# Altium PCB PCB1.PcbDoc
Units mm, origin at the board's own origin, x right, y up, seen from the top; angles counter-clockwise.
Board outline 80 x 45 mm, 2 copper layers (Top Layer, Bottom Layer); 11 components, 19 nets, 75 pads, 0 vias.
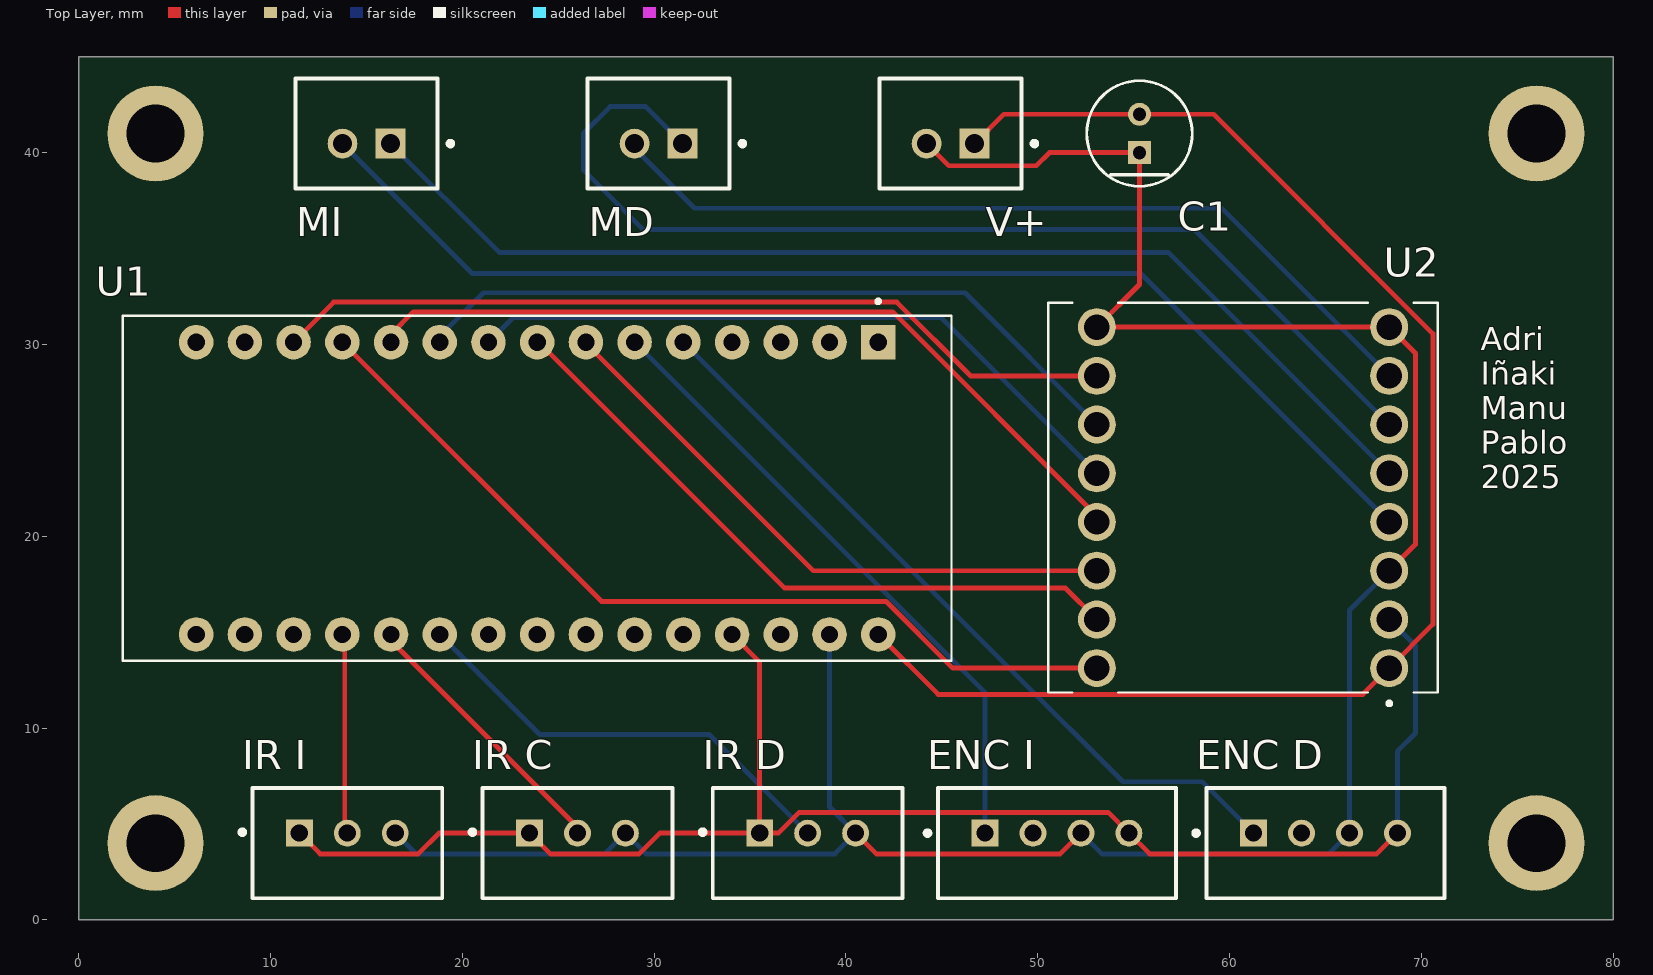
[diagram p0: Top Layer view]
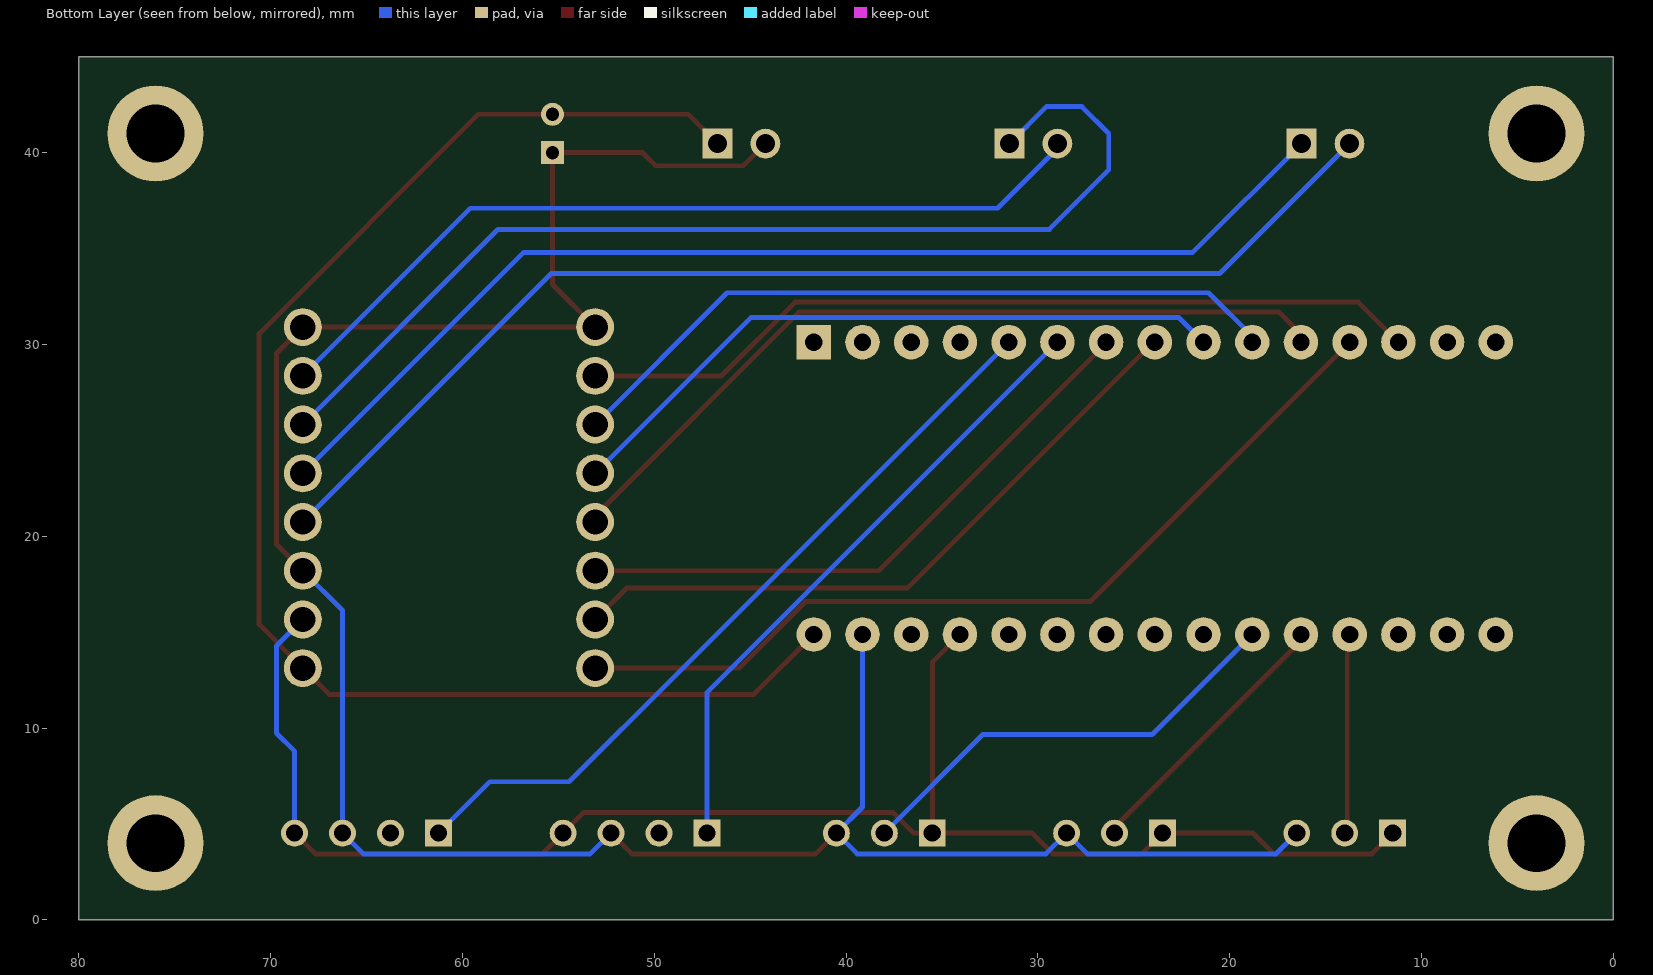
[diagram p1: Bottom Layer view, seen from below]
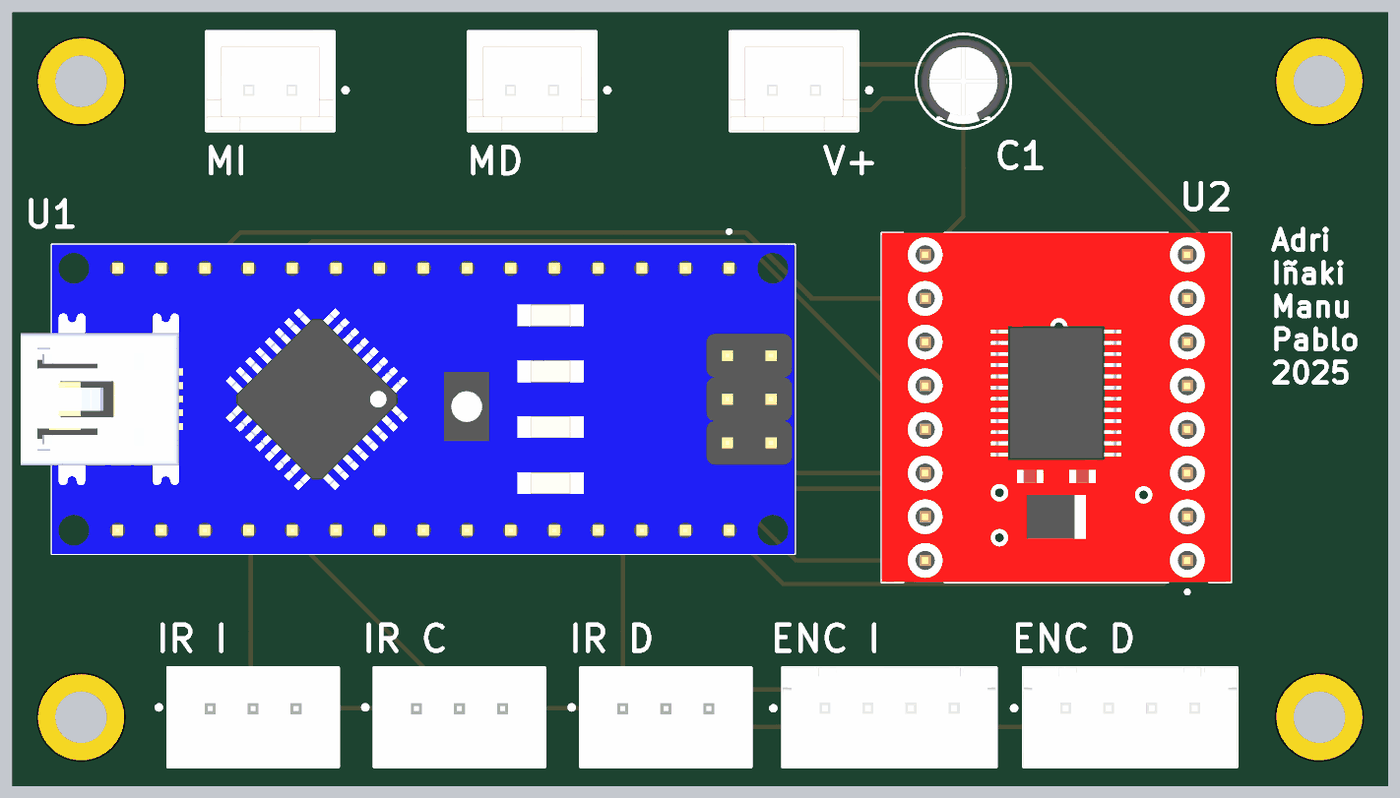
[diagram p2: 3D render of the assembled board from above, using the file's embedded part models]

## Layer stack, top to bottom
Top Solder: solder mask 0.0102, Solder Resist, Dk 3.5
Top Layer: signal copper 0.0356
Dielectric 1: dielectric 0.32, FR-4, Dk 4.8
Bottom Layer: signal copper 0.0356
Bottom Solder: solder mask 0.0102, Solder Resist, Dk 3.5

## Board outline
0,0 0,45 80,45 80,0

## Design rules (kind name [scope] priority, off if disabled: settings)
Clearance [All] p1: gap=0.254 ignorepadtopadclearanceinfootprint=FALSE
PolygonConnect [All] p1: connectstyle=Relief reliefconductorwidth=0.254 reliefentries=4 polygonreliefangle="90 Angle" airgapwidth=0.254
RoutingVias [All] p1: holewidth=0.711 width=1.27 viastyle="Through Hole" minholewidth=0.711 minwidth=1.27 maxholewidth=0.711 maxwidth=1.27
SolderMaskExpansion [All] p1: expansion=0.102 istentingtop=FALSE
SupplyNets "Schematic Supply Nets_2" [InNet('GND')] p1: voltage=0.000
SupplyNets "Schematic Supply Nets_1" [InNet('VCC')] p2: voltage=0.000
SupplyNets "Schematic Supply Nets" [InNet('+5')] p3: voltage=0.000
Width [All] p1: maxlimit=0.254 minlimit=0.254 preferedwidth=0.254
30 further rules are at their usual default settings.

## Components (designator, comment, footprint, x,y, rotation, side; value= is the part's Value field where it differs from the comment)
C1 "100 uF" FP-RAD-TH-D_5_0_5-L_11_1-MFG 55.3,41 r90 top
"ENC D" "Encoder D" FP-B4B-XH-A_LF_SN-MFG 65,4 r180 top (schematic designator J8)
"ENC I" "Encoder I" FP-B4B-XH-A_LF_SN-MFG 51,4 r180 top (schematic designator J7)
"IR C" "IR Centro" FP-B3B-XH-A_LF_SN-MFG 26,4 r0 top (schematic designator J5)
"IR D" "IR Derecha" FP-B3B-XH-A_LF_SN-MFG 38,4 r0 top (schematic designator J6)
"IR I" "IR Izquierda" FP-B3B-XH-A_LF_SN-MFG 14,4 r0 top (schematic designator J4)
MD "Motor D" FP-B2B-XH-A_LF_SN-MFG 30.225,41 r180 top (schematic designator J2)
MI "Motor I" FP-B2B-XH-A_LF_SN-MFG 15,41 r180 top (schematic designator J3)
U1 "ARDUINO_NANO" MODULE_ARDUINO_NANO 23.9,22.5 r270 top
U2 "ROB-14450" MODULE_ROB-14450 60.7,22.015 r180 top (schematic designator U?)
V+ "Supply" FP-B2B-XH-A_LF_SN-MFG 45.45,41 r180 top (schematic designator J1)

## Footprints (in the part's own frame and the unit in brackets; to place one, negate y for a bottom-side part, rotate by r counter-clockwise, add the part's x,y. Pads: shape width x height; smd on the part's side, far side on the other; paste and mask are expansions set on the pad)
FP-B2B-XH-A_LF_SN-MFG [mm]
  rect 1.55x1.55 hole 1 paste-2539.97 mask+0: 1(-1.25,0.525)
  round 1.55 hole 1 paste-2539.97 mask+0: 2(1.25,0.525)
  silkscreen extent -4.5,-2.88 3.7,2.88, body extent -3.8,-2.98 3.8,2.98, height 0.25
FP-B3B-XH-A_LF_SN-MFG [mm]
  rect 1.4x1.4 hole 0.9 paste-2539.97 mask+0: 1(-2.5,0.525)
  round 1.4 hole 0.9 paste-2539.97 mask+0: 2(0,0.525) 3(2.5,0.525)
  silkscreen extent -5.6,-2.88 4.95,2.88, body extent -5.05,-2.98 5.05,2.98, height 0.25
FP-B4B-XH-A_LF_SN-MFG [mm]
  rect 1.4x1.4 hole 0.9 paste-2539.97 mask+0: 1(3.75,-0.525)
  round 1.4 hole 0.9 paste-2539.97 mask+0: 2(1.25,-0.525) 3(-1.25,-0.525) 4(-3.75,-0.525)
  silkscreen extent -6.2,-2.88 6.87,2.88, body extent -6.3,-2.98 6.3,2.98, height 0.25
FP-RAD-TH-D_5_0_5-L_11_1-MFG [mm]
  rect 1.2x1.2 hole 0.7 paste-2539.97 mask+0: 1(-1,0)
  round 1.2 hole 0.7 paste-2539.97 mask+0: 2(1,0)
  silkscreen extent -2.75,-2.75 2.75,2.75, body extent -2.85,-2.85 2.85,2.85, height 0.25
MODULE_ARDUINO_NANO [mm]
  rect 1.8x1.8 / inner round 1.8 / far side rect 1.8x1.8 hole 0.9: 1(-7.62,17.78)
  round 1.8 hole 0.9: 2(-7.62,15.24) 3(-7.62,12.7) 4(-7.62,10.16) 5(-7.62,7.62) 6(-7.62,5.08) 7(-7.62,2.54) 8(-7.62,0) 9(-7.62,-2.54) 10(-7.62,-5.08) 11(-7.62,-7.62) 12(-7.62,-10.16) 13(-7.62,-12.7) 14(-7.62,-15.24) 15(-7.62,-17.78) 16(7.62,-17.78) 17(7.62,-15.24) 18(7.62,-12.7) 19(7.62,-10.16) 20(7.62,-7.62) 21(7.62,-5.08) 22(7.62,-2.54) 23(7.62,0) 24(7.62,2.54) 25(7.62,5.08) 26(7.62,7.62) 27(7.62,10.16) 28(7.62,12.7) 29(7.62,15.24) 30(7.62,17.78)
  silkscreen extent -9.85,-21.6 9,21.6, body extent -9,-23.4 9,21.6, height 12.6
MODULE_ROB-14450 [mm]
  round 1.98 hole 1.32: 1(-7.62,8.89) 2(-7.62,6.35) 3(-7.62,3.81) 4(-7.62,1.27) 5(-7.62,-1.27) 6(-7.62,-3.81) 7(-7.62,-6.35) 8(-7.62,-8.89) 9(7.62,-8.89) 10(7.62,-6.35) 11(7.62,-3.81) 12(7.62,-1.27) 13(7.62,1.27) 14(7.62,3.81) 15(7.62,6.35) 16(7.62,8.89)
  silkscreen extent -10.16,-10.16 10.16,10.83, body extent -10.16,-10.16 10.16,10.16, height 5.5

## Part data
C1: library part CMP-05427-001295-1, "Aluminum Electrolytic Capacitors (Radial Lead Type) 100uF ±20% 16V", Capacitance=10uF, Case/Package=Radial, Max Operating Temperature=105°C, Min Operating Temperature=-40°C, Ripple Current (AC)=250mA, Tolerance=20%, Voltage=50V, Construction=RADIAL, Diameter=5mm, Height=11mm, Impedance=340mR, Lead Diameter=0.5mm, Lead Pitch=2mm, Life (Hours)=5000Hour, REACH SVHC=Yes, RoHS Compliant=Yes, Series="FR Radial", Termination=Radial, Voltage Rating=50V
"ENC D" "ENC I": library part CMP-17439-000250-1, "CONN HEADER VERT 4POS 2.5MM", Color=Natural, Contact Resistance=20mR, Current Rating=3A, Flammability Rating="UL94 V-0", Housing Color=White, Insulation Resistance=1GR, Max Operating Temperature=85°C, Max Voltage Rating (AC)=250V, Min Operating Temperature=-25°C, Package Quantity=500, Connector Type=Header, Contact Finish - Mating=TIN, Contact Material=Brass, Contact Plating=Tin, Contact Shape=Square, Contact Type="Male Pin", Depth=5.75mm, Fastening Type=Detent, Gender=Male, Housing Material=Polyamide, Insulation Color=Natural, Insulation Material=Nylon, Lead Free="Lead Free", Lead Pitch=2.5mm, Length=12.4mm, Mated Stacking Heights=9.8mm, Material=Polyamide, Max Current Rating=3A, Max Voltage Rating (DC)=250V, Mount="Through Hole", Number of Contacts=4, Number of Positions=4, Number of Rows=1, Orientation=Straight, Packaging=Bulk, Pitch=2.5mm, REACH SVHC="No SVHC", Series=XH, Termination=Solder, Voltage Rating=250V, Voltage Rating (AC)=250V, Wire/Cable Gauge=22AWG
"IR C" "IR D" "IR I": library part CMP-17439-000014-3, "CONN HEADER VERT 3POS 2.5MM", Color=Natural, Contact Resistance=20mR, Current Rating=3A, Flammability Rating="UL94 V-0", Housing Color=White, Insulation Resistance=1GR, Max Operating Temperature=85°C, Max Voltage Rating (AC)=250V, Min Operating Temperature=-25°C, Connector Type=Header, Contact Finish - Mating=TIN, Contact Material=Brass, Contact Plating=Tin, Contact Shape=Square, Contact Type="Male Pin", Depth=5.75mm, Fastening Type=Detent, Gender=Male, Housing Material=Polyamide, Insulation Color=Natural, Insulation Material=Nylon, Lead Free="Lead Free", Lead Pitch=2.5mm, Length=9.9mm, Max Current Rating=3A, Max Voltage Rating (DC)=250V, Mount="Through Hole", Number of Contacts=3, Number of Positions=3, Number of Rows=1, Orientation=Straight, Packaging=Bulk, Pitch=2.5mm, REACH SVHC="No SVHC", Series=XH, Termination=Solder, Voltage Rating=250V, Voltage Rating (AC)=250V, Wire/Cable Gauge=22AWG
MD MI V+: library part CMP-2000-05888-3, "CONN HEADER VERT 2POS 2.5MM", Color=Natural, Contact Resistance=20mR, Current Rating=3A, Housing Color=White, Insulation Resistance=1GR, Max Operating Temperature=85°C, Max Voltage Rating (AC)=250V, Min Operating Temperature=-25°C, Connector Type="Male Pin", Contact Material=Brass, Contact Plating=Tin, Contact Type="Male Pin", Depth=5.75mm, Fastening Type=Detent, Housing Material=Polyamide, Lead Free="Lead Free", Lead Pitch=2.5mm, Length=7.4mm, Max Current Rating=3A, Max Voltage Rating (DC)=250V, Mount="Through Hole", Number of Contacts=2, Number of Positions=2, Number of Rows=1, Orientation=Straight, Packaging=Bulk, Pitch=2.5mm, REACH SVHC="No SVHC", Series=XH, Termination=Solder, Voltage Rating=250V, Voltage Rating (AC)=250V, Wire/Cable Gauge=22AWG
U1: "Small, complete, and breadboard-friendly board based on the ATmega328 (Arduino Nano 3.x)", Package="Non-Standard Arduino", Check_prices=https://www.snapeda.com/parts/Arduino%20Nano/Arduino/view-part/?ref=eda, MF=Arduino, MP="Arduino Nano", SnapEDA_Link=https://www.snapeda.com/parts/Arduino%20Nano/Arduino/view-part/?ref=snap
U2: "TB6612FNG Motor Controller/Driver Power Management Evaluation Board", Package=None, Availability="In Stock", Check_prices=https://www.snapeda.com/parts/ROB-14450/SparkFun%20Electronics/view-part/2656367/?ref=eda, MF="SparkFun Electronics", MP=ROB-14450, Price=None, SnapEDA_Link=https://www.snapeda.com/parts/ROB-14450/SparkFun%20Electronics/view-part/2656367/?ref=snap

## Free pads (board coordinates)
  round 5 hole 3: 1(4,4) 2(76,4) 3(76,41) 4(4,41)

## Nets (pads, with @x,y where several pads share a name; then routed paths per layer and width w, separated by ;. In a path a pad name is that pad's centre, name@x,y a point inside that pad or via, vN(x,y) a via of type N, cw(c..) or ccw(c..) an arc to the next point about the centre after c; other vN are vias at no path point)
+5: "ENC D.4" "ENC I.4" "IR C.1" "IR D.1" "IR I.1" U1.27 U2.2 | length 83.9
  Top Layer w0.254: 11.5,4.525 12.581,3.444 17.699,3.444 18.78,4.525 23.5,4.525 24.581,3.444 29.213,3.444 30.294,4.525 35.5,4.525 ; U1.27 35.5,13.44 35.5,4.525 ; 68.75,4.525 67.669,3.444 55.831,3.444 54.75,4.525 53.669,5.606 37.552,5.606 36.471,4.525 35.5,4.525
  Bottom Layer w0.254: U2.2 69.691,14.294 69.691,9.735 68.75,8.793 68.75,4.525
GND: "ENC D.3" "ENC I.3" "IR C.3" "IR D.3" "IR I.3" C1.1 U1.29 U2.3 U2.8 U2.9 V+.2 | length 129.7
  Top Layer w0.254: 40.5,4.525 41.581,3.444 51.169,3.444 52.25,4.525 ; V+.2 45.356,39.319 49.926,39.319 50.607,40 C1.1 55.3,33.125 U2.9 U2.8 69.691,29.534 69.691,19.576 U2.3
  Bottom Layer w0.254: 16.5,4.525 17.581,3.444 27.419,3.444 28.5,4.525 29.581,3.444 39.419,3.444 40.5,4.525 39.14,5.885 U1.29 ; 52.25,4.525 53.331,3.444 65.169,3.444 66.25,4.525 66.25,16.135 U2.3
NetJ2_1: MD.1 U2.6 | length 56
  Bottom Layer w0.254: MD.1 29.55,42.4 27.7,42.4 26.3,41 26.3,39.1 29.4,36 58.145,36 U2.6
NetJ2_2: MD.2 U2.7 | length 44.5
  Bottom Layer w0.254: MD.2 28.975,40.225 32.1,37.1 59.585,37.1 U2.7
NetJ3_1: MI.1 U2.5 | length 59.2
  Bottom Layer w0.254: MI.1 21.925,34.8 56.805,34.8 U2.5
NetJ3_2: MI.2 U2.4 | length 62.7
  Bottom Layer w0.254: MI.2 20.525,33.7 55.365,33.7 U2.4
NetJ4_2: "IR I.2" U1.19 | length 10.5
  Top Layer w0.254: U1.19 13.87,14.75 13.87,4.655 14,4.525
NetJ5_2: "IR C.2" U1.20 | length 14.4
  Top Layer w0.254: U1.20 16.28,14.555 26,4.835 26,4.525
NetJ6_2: "IR D.2" U1.21 | length 23.5
  Bottom Layer w0.254: U1.21 24.036,9.664 32.861,9.664 38,4.525
NetJ7_1: "ENC I.1" U1.6 | length 33.2
  Bottom Layer w0.254: U1.6 47.25,11.85 47.25,4.525
NetJ8_1: "ENC D.1" U1.5 | length 40.3
  Bottom Layer w0.254: U1.5 48.8,12.84 54.44,7.2 58.575,7.2 61.25,4.525
NetU1_7: U1.7 U2.14 | length 31.6
  Top Layer w0.254: U1.7 26.44,30.06 38.295,18.205 U2.14
NetU1_8: U1.8 U2.15 | length 35.2
  Top Layer w0.254: U1.8 23.98,30.12 36.8,17.3 51.445,17.3 U2.15
NetU1_9: U1.9 U2.12 | length 35.6
  Bottom Layer w0.254: U1.9 22.641,31.401 44.964,31.401 U2.12
NetU1_10: U1.10 U2.11 | length 38.4
  Bottom Layer w0.254: U1.10 18.82,30.42 21.1,32.7 46.205,32.7 U2.11
NetU1_11: U1.11 U2.13 | length 42.4
  Top Layer w0.254: U1.11 16.28,30.538 17.442,31.7 42.439,31.7 53.08,21.059 U2.13
NetU1_12: U1.12 U2.16 | length 46.4
  Top Layer w0.254: U1.12 27.26,16.6 42.1,16.6 45.575,13.125 U2.16
NetU1_13: U1.13 U2.10 | length 44.3
  Top Layer w0.254: U1.13 13.288,32.208 42.649,32.208 46.492,28.365 U2.10
VCC: C1.2 U1.30 U2.1 V+.1 | length 76.2
  Top Layer w0.254: U1.30 44.806,11.754 66.949,11.754 U2.1 70.6,15.405 70.6,30.564 59.164,42 C1.2 48.225,42 V+.1
pads on no net: "ENC D.2" "ENC I.2" U1.1 U1.2 U1.3 U1.4 U1.14 U1.15 U1.16 U1.17 U1.18 U1.22 U1.23 U1.24 U1.25 U1.26 U1.28

## Silkscreen, mask and mechanical layers (free items; w line width, h text height)
Top Overlay:
  text "Adri / Iñaki / Manu / Pablo / 2025" at 73.1,22.5 h1.2
Mechanical 1:
  the board outline again, w0.254